# Altium PCB TINY_PENDANT_V1I1.PcbDoc
Units mm, origin at the board's own origin, x right, y up, seen from the top; angles counter-clockwise.
Board outline 22 x 22 mm, 2 copper layers (Top Layer, Bottom Layer), stack 1.671 mm thick; 5 components, 3 nets, 9 pads, 0 vias.
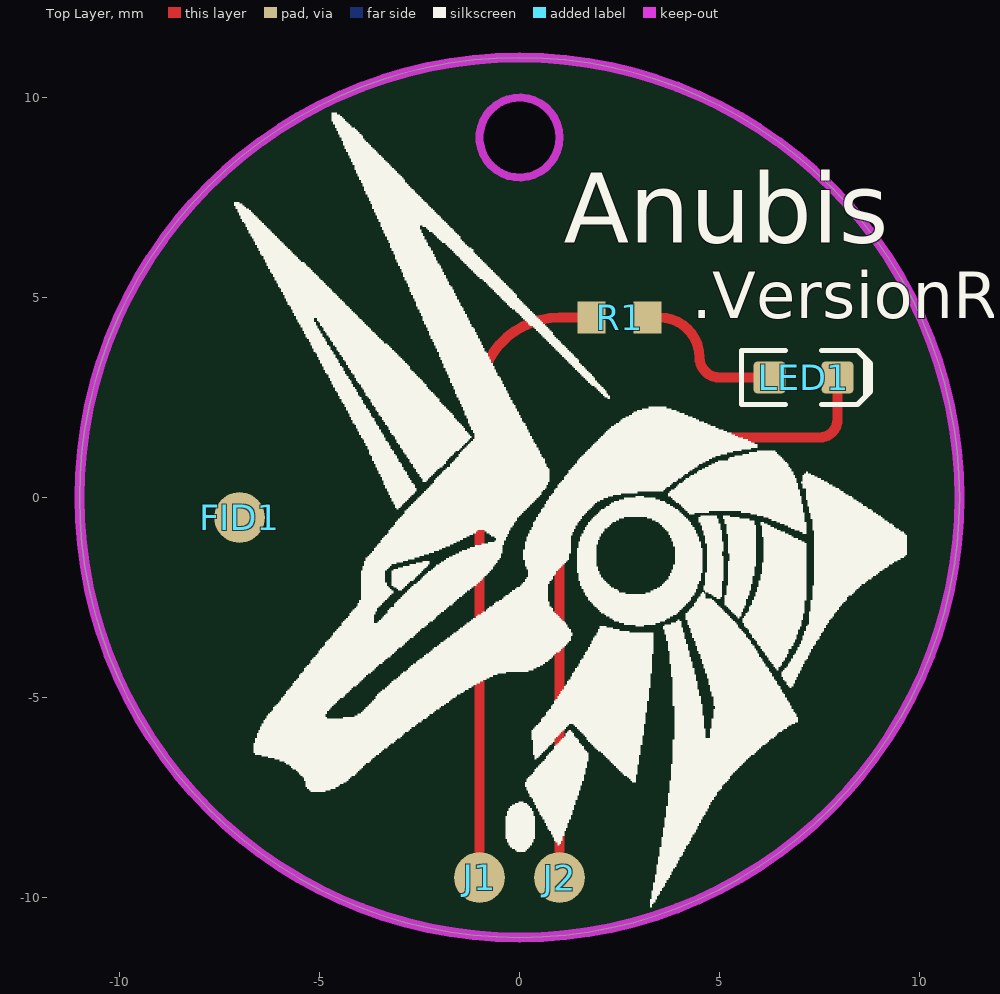
[diagram p0: Top Layer view]
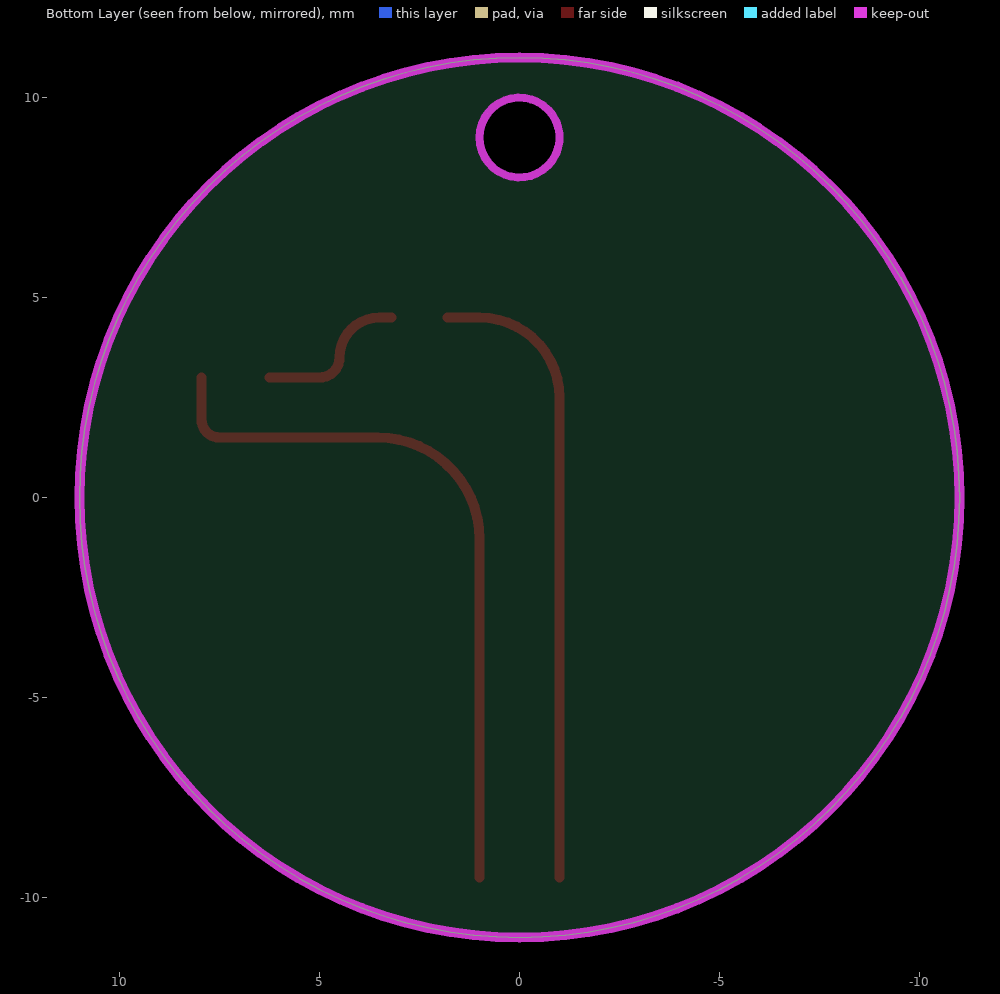
[diagram p1: Bottom Layer view, seen from below]

## Layer stack, top to bottom
Top Solder: solder mask 0.0102, Solder Resist, Dk 3.5
Top Layer: signal copper 0.0356
Dielectric1: dielectric 1.6, FR-4, Dk 4.8
Bottom Layer: signal copper 0.0356
Bottom Solder: solder mask 0.0102, Solder Resist, Dk 3.5

## Board outline
-11,0 ccw(c0,0) 0,-11 ccw(c0,0) 11,0 ccw(c0,0) 0,11 ccw(c0,0)
cut-out: -1,9 ccw(c0,9) 0,8 ccw(c0,9) 1,9 ccw(c0,9) 0,10 ccw(c0,9)

## Design rules (kind name [scope] priority, off if disabled: settings)
Clearance [All] p1: gap=0.254
PolygonConnect [All] p1: connectstyle=Relief reliefconductorwidth=0.254 reliefentries=4 polygonreliefangle="90 Angle" airgapwidth=0.254
RoutingVias [All] p1: holewidth=0.711 width=1.27 viastyle="Through Hole" minholewidth=0.711 minwidth=1.27 maxholewidth=0.711 maxwidth=1.27
SilkToSolderMaskClearance SilkscreenOverComponentPads [IsPad] p1: minsilkscreentomaskgap=0.254 clearancetoexposedcopper=TRUE
SolderMaskExpansion [All] p1: expansion=0.102
Width [All] p1: maxlimit=0.254 minlimit=0.254 preferedwidth=0.254
29 further rules are at their usual default settings.

## Components (designator, comment, footprint, x,y, rotation, side; value= is the part's Value field where it differs from the comment)
FID1 "FIDUCIAL" "FIDUCIAL - 1.27mm" -7,-0.5 r270 top
J1 "1.27mm" "SOLDER PAD - 1.27mm"#1 1.5,-9.5 r270 top
J2 "1.27mm" "SOLDER PAD - 1.27mm"#2 -2,-9.5 r270 top
LED1 "RED" LED-0603-RED 7.1,3 r0 top
R1 "1k" RESC1608X06N 2.5,4.5 r180 top

## Footprints (in the part's own frame and the unit in brackets; to place one, negate y for a bottom-side part, rotate by r counter-clockwise, add the part's x,y. Pads: shape width x height; smd on the part's side, far side on the other; paste and mask are expansions set on the pad)
"FIDUCIAL - 1.27mm" [mm]
  round 1.27 smd: Fiducial(0,0)
LED-0603-RED [mm]
  round 0.254 on Mech15: 0(0,0)
  rrect25% 0.8x0.8 smd: A(-0.85,0) K(0.85,0)
  Top Layer pour cut-out: -0.5,0.5 0.5,0.5 0.5,-0.5 -0.5,-0.5
  silkscreen extent -1.55,-0.67 1.68,0.67, body extent -0.8,-0.4 0.8,0.4, height 0.75
RESC1608X06N [mm] "Chip Resistor, 2-Leads, Body 1,60x0,75mm, IPC Medium Density"
  rect 0.7x0.8 smd: 1(-0.7,0) 2(0.7,0)
  body extent -0.85,-0.4 0.85,0.4, height 0.55
"SOLDER PAD - 1.27mm"#1 [mm]
  round 1.27 smd: 1(0,-2.5)
"SOLDER PAD - 1.27mm"#2 [mm]
  round 1.27 smd: 1(0,3)

## Part data
J1 J2: library part SOLDER_PAD_R_127MM, "SOLDER_PAD_ROUND_127MM"
LED1: library part "LED RED CLEAR 0603 SMD", "LED RED CLEAR 0603 SMD"
R1: library part "RES 1K 0603 1%", "RES SMD 1K OHM 1% 1/10W 0603"

## Free pads (board coordinates)
  round 2 hole 2: 2(0,9)

## Nets (pads, with @x,y where several pads share a name; then routed paths per layer and width w, separated by ;. In a path a pad name is that pad's centre, name@x,y a point inside that pad or via, vN(x,y) a via of type N, cw(c..) or ccw(c..) an arc to the next point about the centre after c; other vN are vias at no path point)
GND: J2.1 LED1.K | length 18.2
  Top Layer w0.254: J2.1 1,-1.04 cw(c3.54,-1.04) 3.54,1.5 7.5,1.5 ccw(c7.5,1.95) 7.95,1.95 LED1.K
NetLED1_A: LED1.A R1.1 | length 3.9
  Top Layer w0.254: R1.1 3.5,4.5 cw(c3.5,3.5) 4.5,3.5 ccw(c5,3.5) 5,3 LED1.A
VCC_5V: J1.1 R1.2 | length 15.9
  Top Layer w0.254: J1.1 -1,2.5 cw(c1,2.5) 1,4.5 R1.2
pads on no net: FID1.Fiducial LED1.0

## Keep-outs
Keep-Out Layer:
  circle w0.2: c0,9 r1
  circle w0.254: c0,0 r11

## Silkscreen, mask and mechanical layers (free items; w line width, h text height)
Top Overlay:
  drawing of 13 lines, arcs and shapes, not listed
  text "Anubis" at 1.1,5.8 h3
  text ".VersionRevision" at 4.3,4.1 h2
Mechanical 4:
  text "Observacoes para producao desta PCI:" at 17.394,34.79 h1.44
  text "- O TOP deve ser AZUL" at 17.194,31.32 h1.44
  text "- A Legenda do TOP deve ser BRANCO" at 18.329,28.262 h1.44
  text "- O BOTTOM deve ser AZUL;" at 17.194,24.791 h1.44
  text "- A Legenda do BOTTOM deve ser BRANCO" at 18.329,21.733 h1.44
  text "- O substrato da PCI dever ser FR-4 com 1.6mm de espessura" at 17.194,18.596 h1.44
  text "Gerbers:" at 18.194,14.94 h1.52
  text "*.GTO - Top Overlay" at 18.194,12.44 h1.52
  text "*.GTP - Top Paste" at 18.194,9.94 h1.52
  text "*.GTS - Top Solder" at 18.194,7.44 h1.52
  text "*.GTL - Top Layer" at 18.194,4.901 h1.52
  text "*.GBL - Bottom Layer" at 18.194,2.301 h1.52
  text "*.GBS - Bottom Solder" at 18.194,-0.199 h1.52
  text "*.GBP - Bottom Paste" at 18.194,-2.699 h1.52
  text "*.GBO - Bottom Overlay" at 18.194,-5.16 h1.52
  text "*.GM4 - Notas de fabricacao" at 18.094,-7.76 h1.52
  text "*.GM14 - Contorno da PCI" at 18.094,-10.26 h1.52
  text "*.GM32 - Medidas" at 18.094,-12.86 h1.52
  text ".Projeto" at 18.767,-24.873 h3
  text "Versao da placa:" at 18.4,-28.629 h1.52
  text ".VersionRevision" at 43.198,-28.677 h1.52
Mechanical 14:
  circle w0.254: c0,0 r11
  circle w0.2: c0,9 r1
Mechanical 32:
  circle w0.254: c0,0 r11
  circle w0.2: c0,9 r1

## Dimensions
0,0 to -15.7,12.1 on Mechanical 16
0,9 to 7.4,14.3 on Mechanical 16